# Altium PCB PCB1_2.PcbDoc
Units mil, origin at the board's own origin, x right, y up, seen from the top; angles counter-clockwise.
Board outline 3550 x 3015 mil, 5 copper layers (Top Layer, GND, Layer 1, Layer 2, Bottom Layer), stack 19.334 mil thick; 346 components, 184 nets, 814 pads, 0 vias.
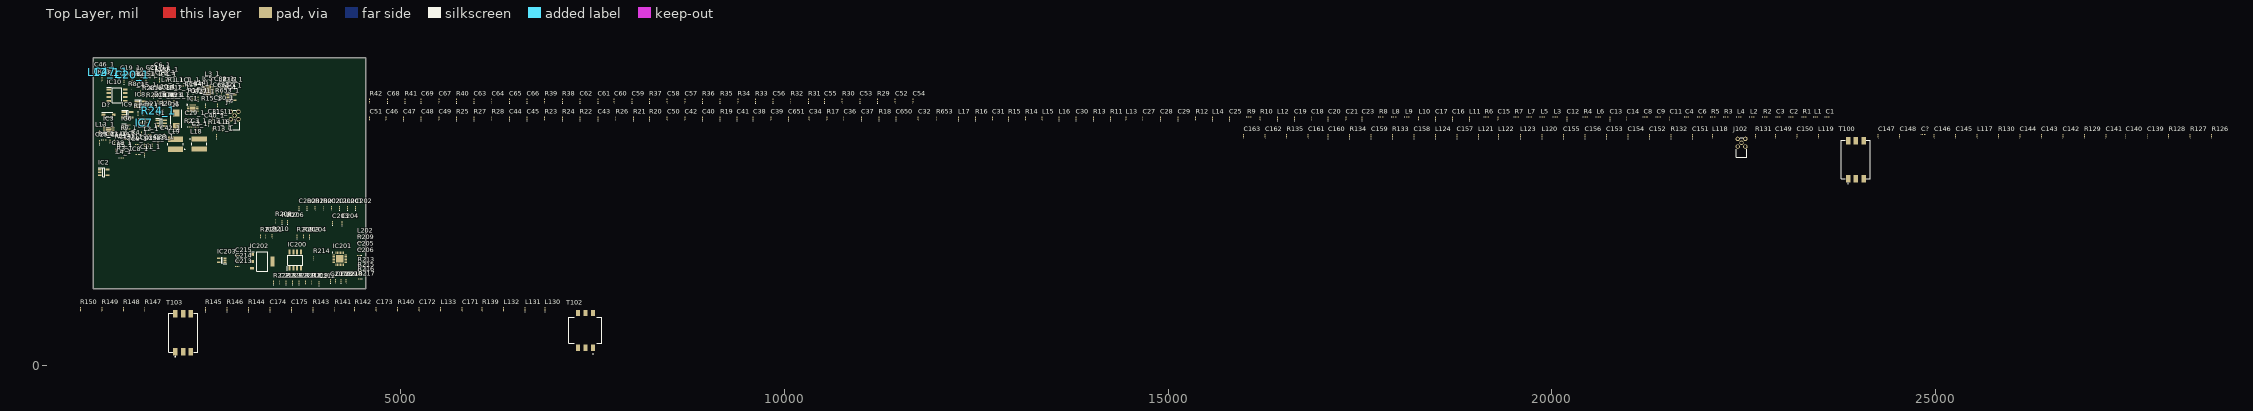
[diagram p0: Top Layer view]
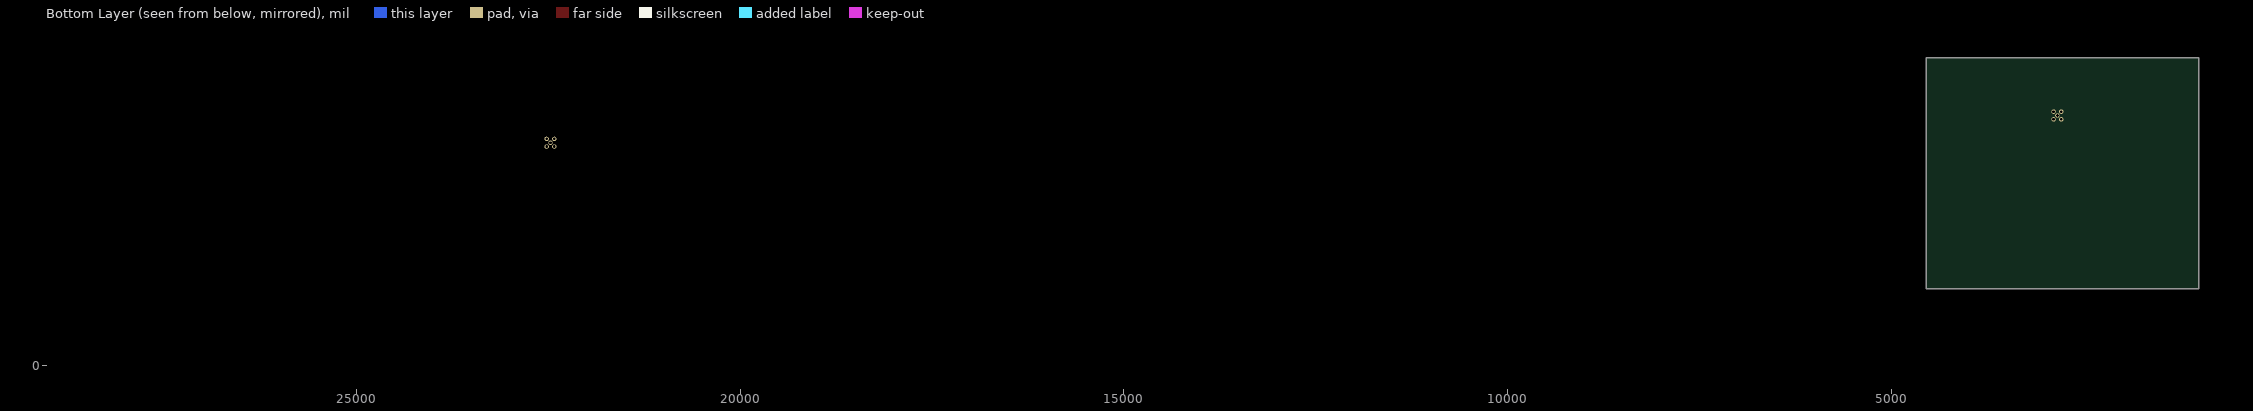
[diagram p1: Bottom Layer view, seen from below]
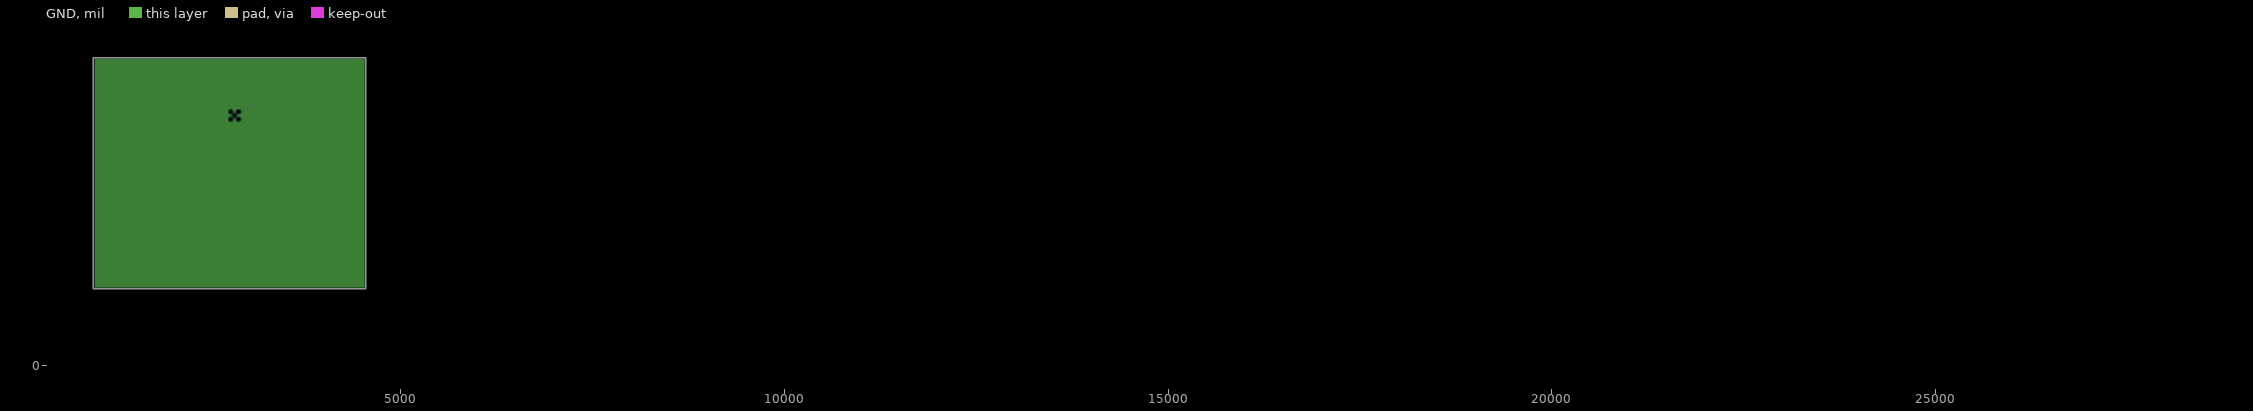
[diagram p2: GND, clearances drawn from the general rule]

## Layer stack, top to bottom
Top Solder: solder mask 0.4, Solder Resist, Dk 3.5
Top Layer: signal copper 1.4
Dielectric 2: prepreg 2.8, PP-006, Dk 4.1
GND: plane copper 1.378
Dielectric 1: core 4, Core-009, Dk 4.5
Layer 1: signal copper 1.378
Dielectric 4: prepreg 2.8, PP-006, Dk 4.1
Layer 2: signal copper 1.378
Dielectric 5: prepreg 2.8, PP-006, Dk 4.1
Bottom Layer: signal copper 1.4
Bottom Solder: solder mask 0.4, Solder Resist, Dk 3.5

## Board outline
1000,1000 4550,1000 4550,4015 1000,4015

## Design rules (kind name [scope] priority, off if disabled: settings)
Clearance [All] p1: gap=10 ignorepadtopadclearanceinfootprint=FALSE except(0: Arc-Hole Track-Hole SMDPad-Hole THPad-Hole Via-Hole Fill-Hole Poly-Hole Region-Hole Text-Hole; 5: Arc-SMDPad Track-SMDPad SMDPad-SMDPad)
DiffPairsRouting [All] p1 off: maxlimit=10 minlimit=10 mostfreqgap=10 toplayer_minwidth=15 toplayer_maxwidth=15 toplayer_prefwidth=15 midlayer1_minwidth=15 midlayer1_maxwidth=15 midlayer1_prefwidth=15 midlayer2_minwidth=15 midlayer2_maxwidth=15 midlayer2_prefwidth=15 bottomlayer_minwidth=15 bottomlayer_maxwidth=15 bottomlayer_prefwidth=15 maxuncoupledlength=500
PlaneClearance [All] p1: clearance=20
PlaneConnect [All] p1: planeconnectstyle=Relief reliefexpansion=20 reliefentries=4 reliefconductorwidth=10 reliefairgap=10
PolygonConnect [All] p1: connectstyle=Relief reliefconductorwidth=10 reliefentries=4 polygonreliefangle="90 Angle" airgapwidth=10
RoomDefinition PA [InComponentClass('PA')] p1: confinementstyle=ConfineIn formatcopy=TRUE lockcomponents=FALSE outline 4580,3180 23665,3180 23665,3360 4580,3360
RoomDefinition Sheet1 [InComponentClass('Sheet1')] p2: confinementstyle=ConfineIn formatcopy=TRUE lockcomponents=FALSE outline 4580,3410 11850,3410 11850,3590 4580,3590
RoutingVias [All] p1: holewidth=28 width=50 viastyle="Through Hole" minholewidth=28 minwidth=50 maxholewidth=28 maxwidth=50
SolderMaskExpansion [All] p1: expansion=4 istentingtop=FALSE
Width [All] p1: maxlimit=10 minlimit=5 preferedwidth=5 minimp=50.000000 maximp=50.000000 favimp=50.000000
27 further rules are at their usual default settings.

## Classes and differential pairs
component class TELEMETRY: C200 C201 C202 C203 C204 C205 C206 C207 C208 C209 C210 C211 C212 C213 C214 C215 IC200 IC201 IC202 IC203 L200 L201 L202 R200 R201 R202 R203 R204 R205 R206 R207 R208 R209 R210 R211 R212 R213 R214 R215 R216 R217 R218 R219 R220 R221 R222 R223
component class Sheet1: C52 C53 C54 C55 C56 C57 C58 C59 C60 C61 C62 C63 C64 C65 C66 C67 C68 C69 J? R29 R30 R31 R32 R33 R34 R35 R36 R37 R38 R39 R40 R41 R42
component class PA: C1 C2 C3 C4 C6 C8 C9 C11 C12 C13 C14 C15 C16 C17 C18 C19 C20 C21 C23 C25 C27 C28 C29 C30 C31 C32 C34 C36 C37 C38 C39 C40 C41 C42 C43 C44 C45 C46 C47 C48 C49 C50 C51 C650 C651 D6 D? IC1 IC2 IC3 IC4 IC5 IC6 IC7 IC8 IC9 IC10 L1 L2 L3 L4 L5 L6 L7 L8 L9 L10 L11 L12 L13 L14 L15 L16 L17 L18 L19 Q1 R1 R2 R3 R4 R5 R6 R7 R8 R9 R10 R11 R12 R13 R14 R15 R16 R17 R18 R19 R20 R21 R22 R23 R24 R25 R26 R27 R28 R653
component class "Mixers and IF": C139 C140 C141 C142 C143 C144 C145 C146 C147 C148 C149 C150 C151 C152 C153 C154 C155 C156 C157 C158 C159 C160 C161 C162 C163 C171 C172 C173 C174 C175 C? J102 L117 L118 L119 L120 L121 L122 L123 L124 L130 L131 L132 L133 R126 R127 R128 R129 R130 R131 R132 R133 R134 R135 R139 R140 R141 R142 R143 R144 R145 R146 R147 R148 R149 R150 T100 T102 T103

## Components (designator, comment, footprint, x,y, rotation, side; value= is the part's Value field where it differs from the comment)
C1 "Cap" 0603 23595,3240 r0 top value=33pF
C1_1 "Cap" 0603 2250,3645 r180 top value=33pF
C2 "Cap" 0603 23125,3240 r0 top value=1uF
C2_1 "Cap" 0603 2360,3070 r0 top value=1uF
C3 "Cap" 0603 22955,3240 r0 top value=470pF
C3_1 "Cap" 0603 2350,3110 r0 top value=470pF
C4 "Cap" 0603 21765,3240 r0 top value=12pF
C4_1 "Cap" 0603 1960,3720 r0 top value=12pF
C6 "Cap" 0603 21935,3240 r0 top value=5.1pF
C6_1 "Cap" 0603 1875,3840 r0 top value=5.1pF
C8 "Cap" 0603 21225,3240 r0 top value=10pF
C8_1 "Cap" 0603 1575,2750 r180 top value=10pF
C9 "Cap" 0603 21395,3240 r0 top value=5.1pF
C9_1 "Cap" 0603 1565,2880 r180 top value=5.1pF
C11 "Cap" 0603 21535,3225 r90 top value=470pF
C11_1 "Cap" 0603 1665,2755 r90 top value=470pF
C12 "Cap" 0603 20195,3225 r90 top value=470pF
C12_1 "Cap" 0603 1860,3715 r270 top value=470pF
C13 "Cap" 0603 20755,3225 r90 top value=470pF
C13_1 "Cap" 0603 1385,2895 r90 top value=470pF
C14 "Cap" 0603 20975,3225 r90 top value=10nF
C14_1 "Cap" 0603 1275,2921.22 r90 top value=10nF
C15 "Cap" 0603 19295,3225 r90 top value=33pF
C15_1 "Cap" 0603 1615,3560 r90 top value=33pF
C16 "Cap" 0603 18705,3225 r90 top value=6.8pF
C16_1 "Cap" 0603 1785,3525 r90 top value=6.8pF
C17 "Cap" 0603 18485,3225 r90 top value=470pF
C17_1 "Cap" 0603 1795,3783.78 r90 top value=470pF
C18 "Cap" 0603 16865,3225 r90 top value=470pF
C18_1 "Cap" 0603 1295,2805 r90 top value=470pF
C19 "Cap" 0603 16645,3225 r90 top value=470pF
C19_1 "Cap" 0603 1400,3785 r90 top value=470pF
C20 "Cap" 0603 17085,3225 r90 top value=5.1pF
C20_1 "Cap" 0603 1510,3790 r90 top value=5.1pF
C21 "Cap" 0603 17315,3225 r90 top value=16pF
C21_1 "Cap" 0603 1740,3790 r90 top value=16pF
C23 "Cap" 0603 17525,3225 r90 top value=5.1pF
C23_1 "Cap" 0603 1215,2925 r90 top value=5.1pF
C25 "Cap" 0603 15800,3225 r90 top value=470pF
C25_1 "Cap" 0603 1080,2915 r90 top value=470pF
C27 "Cap" 0603 14670,3225 r90 top value=12pF
C27_1 "Cap" 0603 2365,3481.22 r90 top value=12pF
C28 "Cap" 0603 14900,3225 r90 top value=470pF
C28_1 "Cap" 0603 1840,2890 r90 top value=470pF
C29 "Cap" 0603 15130,3225 r90 top value=1uF
C29_1 "Cap" 0603 2240,3195 r90 top value=1uF
C30 "Cap" 0603 13800,3225 r90 top value=470pF
C30_1 "Cap" 0603 2620,3393.78 r90 top value=470pF
C31 "Cap" 0603 12710,3225 r90 top value=470pF
C31_1 "Cap" 0603 2550,3220 r90 top value=470pF
C32 "Cap" 0603 11745,3225 r90 top value=470pF
C32_1 "Cap" 0603 2625,3640 r90 top value=470pF
C34 "Cap" 0603 10325,3225 r90 top value=1uF
C34_1 "Cap" 0603 2300,3578.78 r90 top value=1uF
C36 "Cap" 0603 10775,3225 r90 top value=4.7uF
C36_1 "Cap" 0603 1945,3530 r90 top value=4.7uF
C37 "Cap" 0603 11005,3225 r90 top value=4.7uF
C37_1 "Cap" 0603 1900,3435 r90 top value=4.7uF
C38 "Cap" 0603 9595,3225 r90 top value=22uF
C38_1 "Cap" 0603 1765,2870 r90 top value=22uF
C39 "Cap" 0603 9825,3225 r90 top value=22uF
C39_1 "Cap" 0603 1715,2875 r90 top value=22uF
C40 "Cap" 0603 8935,3225 r90 top value=47uF
C40_1 "Cap" 0603 2500,3163.78 r90 top value=47uF
C41 "Cap" 0603 9385,3225 r90 top value=.1uF
C41_1 "Cap" 0603 1665,2870 r90 top value=.1uF
C42 "Cap" 0603 8705,3225 r90 top value=47uF
C42_1 "Cap" 0603 1925,3005 r90 top value=47uF
C43 "Cap" 0603 7575,3225 r90 top value=1uF
C43_1 "Cap" 0603 2320,3486.22 r90 top value=1uF
C44 "Cap" 0603 6420,3225 r90 top value=4.7uF
C44_1 "Cap" 0603 1630,3030 r90 top value=4.7uF
C45 "Cap" 0603 6650,3225 r90 top value=4.7uF
C45_1 "Cap" 0603 1985,3435 r90 top value=4.7uF
C46 "Cap" 0603 4810,3225 r90 top value=4.7uF
C46_1 "Cap" 0603 1065,3828.78 r90 top value=4.7uF
C47 "Cap" 0603 5040,3225 r90 top value=4.7uF
C47_1 "Cap" 0603 1235,3830 r90 top value=4.7uF
C48 "Cap" 0603 5270,3225 r90 top value=1uF
C48_1 "Cap" 0603 1505,3703.78 r90 top value=1uF
C49 "Cap" 0603 5500,3225 r90 top value=470pF
C49_1 "Cap" 0603 1400,3703.78 r90 top value=470pF
C50 "Cap" 0603 8475,3225 r90 top value=220pF
C50_1 "Cap" 0603 1645,3280 r270 top value=220pF
C51 "Cap" 0603 4600,3225 r90 top value=.1uF
C51_1 "Cap" 0603 1685,3705 r90 top value=.1uF
C52 "Cap" 0603 11445,3455 r90 top value=470pF
C53 "Cap" 0603 10985,3455 r90 top value=470pF
C54 "Cap" 0603 11675,3455 r90 top value=470pF
C55 "Cap" 0603 10525,3455 r90 top value=470pF
C56 "Cap" 0603 9855,3455 r90 top value=470pF
C57 "Cap" 0603 8705,3455 r90 top value=470pF
C58 "Cap" 0603 8475,3455 r90 top value=470pF
C59 "Cap" 0603 8015,3455 r90 top value=.1uF
C60 "Cap" 0603 7785,3455 r90 top value=.1uF
C61 "Cap" 0603 7575,3455 r90 top value=.1uF
C62 "Cap" 0603 7340,3455 r90 top value=470pF
C63 "Cap" 0603 5960,3455 r90 top value=4.7uF
C64 "Cap" 0603 6190,3455 r90 top value=4.7uF
C65 "Cap" 0603 6420,3455 r90 top value=.1uF
C66 "Cap" 0603 6650,3455 r90 top value=.1uF
C67 "Cap" 0603 5500,3455 r90 top value=4.7uF
C68 "Cap" 0603 4830,3455 r90 top value=1uF
C69 "Cap" 0603 5270,3455 r90 top value=4.7uF
C139 "Cap" 0603 27755,2995 r90 top value=470pF
C140 "Cap" 0603 27475,2995 r90 top value=1nF
C141 "Cap" 0603 27215,2995 r90 top value=470pF
C142 "Cap" 0603 26655,2995 r90 top value=1nF
C143 "Cap" 0603 26375,2995 r90 top value=16pF
C144 "Cap" 0603 26095,2995 r90 top value=1nF
C145 "Cap" 0603 25260,2995 r90 top value=1.8pF
C146 "Cap" 0603 24980,2995 r90 top value=4.7uF
C147 "Cap" 0603 24250,2995 r90 top value=4.7uF
C148 "Cap" 0603 24530,2995 r90 top value=4.7uF
C149 "Cap" 0603 22910,2995 r90 top value=82pF
C150 "Cap" 0603 23190,2995 r90 top value=82pF
C151 "Cap" 0603 21830,2995 r90 top value=470pF
C152 "Cap" 0603 21270,2995 r90 top value=1nF
C153 "Cap" 0603 20710,2995 r90 top value=470pF
C154 "Cap" 0603 20990,2995 r90 top value=470pF
C155 "Cap" 0603 20150,2995 r90 top value=.5pF
C156 "Cap" 0603 20430,2995 r90 top value=1.8pF
C157 "Cap" 0603 18765,2995 r90 top value=22pF
C158 "Cap" 0603 18205,2995 r90 top value=1nF
C159 "Cap" 0603 17645,2995 r90 top value=470pF
C160 "Cap" 0603 17085,2995 r90 top value=470pF
C161 "Cap" 0603 16825,2995 r90 top value=1.8pF
C162 "Cap" 0603 16265,2995 r90 top value=1nF
C163 "Cap" 0603 15985,2995 r90 top value=3.9pF
C171 "Cap" 0603 5805,740 r90 top value=1nF
C172 "Cap" 0603 5245,740 r90 top value=1nF
C173 "Cap" 0603 4685,740 r90 top value=1.8pF
C174 "Cap" 0603 3300,740 r90 top value=1nF
C175 "Cap" 0603 3580,740 r90 top value=1nF
C200 "Cap" 0603 3680,2058.78 r90 top value=10nF
C201 "Cap" 0603 4100,2058.78 r90 top value=180pF
C202 "Cap" 0603 4415,2058.78 r90 top value=560pF
C203 "Cap" 0603 4115,1863.78 r90 top value=270pF
C204 "Cap" 0603 4240,1858.78 r90 top value=270pF
C205 "Cap" 0603 4460,1520 r180 top value=1nF
C206 "Cap" 0603 4460,1435 r180 top value=4.7uF
C207 "Cap" 0603 4088.33,1108.78 r90 top value=2.2pF
C208 "Cap" 0603 4156.67,1108.78 r90 top value=2.2pF
C209 "Cap" 0603 4225,1108.78 r90 top value=2.2pF
C210 "Cap" 0603 4293.33,1108.78 r90 top value=2.2pF
C211 "Cap" 0603 3428.33,1088.78 r90 top value=1nF
C212 "Cap" 0603 3940,1080 r90 top value=10nF
C213 "Cap" 0603 2870,1295 r180 top value=1nF
C214 "Cap" 0603 2870,1365 r180 top value=4.7uF
C215 "Cap" 0603 2870,1435 r180 top value=4.7uF
C650 "Cap" 0603 11455,3225 r90 top value=39pF
C650_1 "Cap" 0603 2670,3555 r90 top value=39pF
C651 "Cap" 0603 10055,3225 r90 top value=39pF
C651_1 "Cap" 0603 2610,3560 r90 top value=39pF
C? "Cap" 0603 24840,3010 r0 top value=4.7uF
D6 "MBRS120T3G" DIOM5436X247N 2080,3205 r270 top
D? "BAT46W-7-F" SOD3716X145N 1200,3270 r0 top
IC1 "RFPA0133TR7" QFN50P300X300X86-17N-D 2295,3340 r0 top
IC2 "RF2878SR" SOT95P280X159-5N 1135,2520 r0 top
IC3 "RFPA0133TR7" QFN50P300X300X86-17N-D 1200,3075 r0 top
IC4 "RF2878SR" SOT95P280X159-5N 2795,3495 r0 top
IC5 "LTC5533EDE#PBF" SON50P300X400X85-13N-D 2495,3590 r0 top
IC6 "FPF2000" SOT65P210X110-5N#1 1425,3110 r0 top
IC7 "LTC1772CS6#TRMPBF" SOT95P280X100-6N 1660,3165 r0 top
IC8 "MCP6231UT-E_OT" SOT95P270X145-5N 1615,3405 r0 top
IC9 "MCP6231UT-E_OT" SOT95P270X145-5N 1444.21,3270 r0 top
IC10 "LT1963AES8-3.3#PBF" SOIC127P599X175-8N 1310,3525 r0 top
IC200 "THS4531ID" SOIC127P600X175-8N 3630,1375 r90 top
IC201 "LTC5599IUF#TRPBF" QFN50P400X400X80-25N-D 4210,1395 r0 top
IC202 "LT1963EST-2.5" SOT230P700X180-4N 3200,1360 r0 top
IC203 "FPF2000" SOT65P210X110-5N#2 2675.63,1375.59 r180 top
J102 "CONMMCX002" CONMMCX002 22470,2905 r90 top
J? "CONMMCX002" CONMMCX002 2840,3260 r90 top
L1 "Inductor" 0603 23445,3240 r0 top value=8.7nH
L1_1 "Inductor" 0603 2155,3645 r0 top value=8.7nH
L2 "Inductor" 0603 22615,3240 r0 top value=18nH
L2_1 "Inductor" 0603 1735,3010 r0 top value=18nH
L3 "Inductor" 0603 20055,3240 r0 top value=10.4nH
L3_1 "Inductor" 0603 2530,3725 r0 top value=10.4nH
L4 "Inductor" 0603 22445,3240 r0 top value=18nH
L4_1 "Inductor" 0603 1375,2705 r0 top value=18nH
L5 "Inductor" 0603 19885,3240 r0 top value=25nH
L5_1 "Inductor" 0603 1876.22,3785 r0 top value=25nH
L6 "Inductor" 0603 20615,3240 r0 top value=25nH
L6_1 "Inductor" 0603 1430,2950 r0 top value=25nH
L7 "Inductor" 0603 19715,3240 r0 top value=18nH
L7_1 "Inductor" 0603 1965,3645 r0 top value=18nH
L8 "Inductor" 0603 17950,3240 r0 top value=8.7nH
L8_1 "Inductor" 0603 1215,3745 r180 top value=8.7nH
L9 "Inductor" 0603 18120,3240 r0 top value=25nH
L9_1 "Inductor" 0603 1635,3775 r0 top value=25nH
L10 "Inductor" 0603 18265,3225 r90 top value=18nH
L10_1 "Inductor" 0603 1880,3531.22 r270 top value=18nH
L11 "Inductor" 0603 18925,3225 r90 top value=25nH
L11_1 "Inductor" 0603 1455,2890 r90 top value=25nH
L12 "Inductor" 0603 16425,3225 r90 top value=18nH
L12_1 "Inductor" 0603 1145,3825 r90 top value=18nH
L13 "Inductor" 0603 14450,3225 r90 top value=18nH
L13_1 "Inductor" 0603 1080,3046.22 r90 top value=18nH
L14 "Inductor" 0603 15580,3225 r90 top value=10.4nH
L14_1 "Inductor" 0603 2365,3595 r90 top value=10.4nH
L15 "Inductor" 0603 13360,3225 r90 top value=39nH
L15_1 "Inductor" 0603 2610,3213.78 r90 top value=39nH
L16 "Inductor" 0603 13580,3225 r90 top value=18nH
L16_1 "Inductor" 0603 2680,3073.78 r270 top value=18nH
L17 "Inductor" 0603 12270,3225 r90 top value=39nH
L17_1 "Inductor" 0603 2685,3635 r90 top value=39nH
L18 "MSS5131-472MLB" MSS5131 2380,2889.25 r0 top
L19 "MSS5131-103MLB" MSS5131 2070,2885.75 r180 top
L117 "Inductor" 0603 25540,2995 r90 top value=2508_23
L118 "Inductor" 0603 22090,2995 r90 top value=1508_13
L119 "Inductor" 0603 23470,2995 r90 top value=1508_23
L120 "Inductor" 0603 19870,2995 r90 top value=18nH
L121 "Inductor" 0603 19045,2995 r90 top value=2.7uH
L122 "Inductor" 0603 19305,2995 r90 top value=2.7uH
L123 "Inductor" 0603 19590,2995 r90 top value=8.2uH
L124 "Inductor" 0603 18485,2995 r90 top value=18nH
L130 "Inductor" 0603 6885,740 r90 top value=68nH
L131 "Inductor" 0603 6625,740 r90 top value=8.2uH
L132 "Inductor" 0603 6345,740 r90 top
L133 "Inductor" 0603 5525,740 r90 top value=1.5uH
L200 "Inductor" 0603 4205,2058.78 r90 top value=120nH
L201 "Inductor" 0603 4310,2058.78 r90 top value=47nH
L202 "Inductor" 0603 4460,1690 r180 top value=330nH
Q1 "FDC638P" SOT95P280X110-6N 1885,3160 r0 top
R1 "Res1" 0603 23295,3240 r0 top value=10
R1_1 "Res1" 0603 2055,3645 r0 top value=10
R2 "Res1" 0603 22785,3240 r0 top value=560
R2_1 "Res1" 0603 2265,3110 r0 top value=560
R3 "Res1" 0603 22275,3240 r0 top value=510
R3_1 "Res1" 0603 1375,2755 r180 top value=510
R4 "Res1" 0603 20445,3240 r0 top value=200
R4_1 "Res1" 0603 1576.22,2965 r0 top value=200
R5 "Res1" 0603 22105,3240 r0 top value=1.8k
R5_1 "Res1" 0603 1375,2800 r180 top value=1.8k
R6 "Res1" 0603 19155,3240 r0 top value=100
R6_1 "Res1" 0603 1975,3785 r0 top value=100
R7 "Res1" 0603 19545,3240 r0 top value=100
R7_1 "Res1" 0603 1425,3020 r180 top value=100
R8 "Res1" 0603 17780,3240 r0 top value=10
R8_1 "Res1" 0603 1535,3595 r0 top value=10
R9 "Res1" 0603 16060,3240 r0 top value=200
R9_1 "Res1" 0603 1145,2940 r0 top value=200
R10 "Res1" 0603 16200,3225 r90 top value=1.5k
R10_1 "Res1" 0603 1845,3435 r90 top value=1.5k
R11 "Res1" 0603 14250,3225 r90 top value=15
R11_1 "Res1" 0603 1335,2895 r90 top value=15
R12 "Res1" 0603 15360,3225 r90 top value=49.9
R12_1 "Res1" 0603 2050,3530 r90 top value=49.9
R13 "Res1" 0603 14030,3225 r90 top value=1.2k
R13_1 "Res1" 0603 2605,2993.78 r90 top value=1.2k
R14 "Res1" 0603 13140,3225 r90 top value=510
R14_1 "Res1" 0603 2550,3081.22 r90 top value=510
R15 "Res1" 0603 12920,3225 r90 top value=2k
R15_1 "Res1" 0603 2460,3380 r270 top value=2k
R16 "Res1" 0603 12490,3225 r90 top value=15
R16_1 "Res1" 0603 2735,3635 r90 top value=15
R17 "Res1" 0603 10555,3225 r90 top value=68k
R17_1 "Res1" 0603 2285,3490 r90 top value=68k
R18 "Res1" 0603 11235,3225 r90 top value=.03
R18_1 "Res1" 0603 1950,3435 r90 top value=.03
R19 "Res1" 0603 9165,3225 r90 top value=12k
R19_1 "Res1" 0603 2240,3570 r90 top value=12k
R20 "Res1" 0603 8245,3225 r90 top value=100k
R20_1 "Res1" 0603 1910,3320 r90 top value=100k
R21 "Res1" 0603 8035,3225 r90 top value=4.7k
R21_1 "Res1" 0603 1735,3315 r90 top value=4.7k
R22 "Res1" 0603 7340,3225 r90 top value=1.8k
R22_1 "Res1" 0603 1740,3430 r90 top value=1.8k
R23 "Res1" 0603 6880,3225 r90 top value=470k
R23_1 "Res1" 0603 2050,3435 r90 top value=470k
R24 "Res1" 0603 7110,3225 r90 top value=200k
R24_1 "Res1" 0603 1845,3323.78 r90 top value=200k
R25 "Res1" 0603 5730,3225 r90 top value=5.11k
R25_1 "Res1" 0603 1110,3735 r90 top value=5.11k
R26 "Res1" 0603 7805,3225 r90 top value=10k
R26_1 "Res1" 0603 1580,3280 r270 top value=10k
R27 "Res1" 0603 5960,3225 r90 top value=300k
R27_1 "Res1" 0603 1600,3698.78 r270 top value=300k
R28 "Res1" 0603 6190,3225 r90 top value=3.83k
R28_1 "Res1" 0603 1690,3526.22 r90 top value=3.83k
R29 "Res1" 0603 11215,3455 r90 top value=1M
R30 "Res1" 0603 10755,3455 r90 top value=100
R31 "Res1" 0603 10315,3455 r90 top value=100
R32 "Res1" 0603 10085,3455 r90 top value=1M
R33 "Res1" 0603 9625,3455 r90 top value=1M
R34 "Res1" 0603 9395,3455 r90 top value=100
R35 "Res1" 0603 9165,3455 r90 top value=100
R36 "Res1" 0603 8935,3455 r90 top value=1M
R37 "Res1" 0603 8245,3455 r90 top value=100
R38 "Res1" 0603 7110,3455 r90 top value=100
R39 "Res1" 0603 6880,3455 r90 top value=.1
R40 "Res1" 0603 5730,3455 r90 top value=430k
R41 "Res1" 0603 5060,3455 r90 top value=5.76k
R42 "Res1" 0603 4600,3455 r90 top value=3.83k
R126 "Res1" 0603 28595,2995 r90 top value=TBD
R127 "Res1" 0603 28315,2995 r90 top value=10k
R128 "Res1" 0603 28035,2995 r90 top value=15k
R129 "Res1" 0603 26935,2995 r90 top value=470
R130 "Res1" 0603 25815,2995 r90 top value=2.2k
R131 "Res1" 0603 22650,2995 r90 top value=470
R132 "Res1" 0603 21550,2995 r90 top value=3
R133 "Res1" 0603 17925,2995 r90 top value=TBD
R134 "Res1" 0603 17365,2995 r90 top value=15k
R135 "Res1" 0603 16545,2995 r90 top value=10k
R139 "Res1" 0603 6065,740 r90 top value=560
R140 "Res1" 0603 4965,740 r90 top value=2.7k
R141 "Res1" 0603 4145,740 r90 top value=2.2k
R142 "Res1" 0603 4405,740 r90 top value=5.1
R143 "Res1" 0603 3860,740 r90 top value=1k
R144 "Res1" 0603 3020,740 r90 top value=1k
R145 "Res1" 0603 2460,740 r90 top value=10k
R146 "Res1" 0603 2740,740 r90 top value=470
R147 "Res1" 0603 1670,740 r90 top value=62
R148 "Res1" 0603 1390,740 r90 top value=4.7k
R149 "Res1" 0603 1110,740 r90 top value=10k
R150 "Res1" 0603 830,740 r90 top value=470
R200 "Res1" 0603 3890,2058.78 r90 top value=68
R201 "Res1" 0603 3785,2058.78 r90 top value=100
R202 "Res1" 0603 3995,2058.78 r90 top value=100
R203 "Res1" 0603 3735,1688.78 r90 top value=TBD
R204 "Res1" 0603 3817.5,1688.78 r90 top value=10K
R205 "Res1" 0603 3652.5,1688.78 r90 top value=15K
R206 "Res1" 0603 3530,1877.56 r90 top value=10k
R207 "Res1" 0603 3459,1877.56 r90 top value=1k
R208 "Res1" 0603 3370,1885 r90 top value=10k
R209 "Res1" 0603 4460,1605 r180 top value=20k
R210 "Res1" 0603 3330,1693.78 r90 top value=200
R211 "Res1" 0603 3246,1688.78 r90 top value=10k
R212 "Res1" 0603 3175,1688.78 r90 top value=1K
R213 "Res1" 0603 4463.78,1310 r180 top value=1K
R214 "Res1" 0603 3865,1408.78 r90 top value=200
R215 "Res1" 0603 4463.78,1250 r180 top value=1K
R216 "Res1" 0603 4463.78,1190 r180 top value=1K
R217 "Res1" 0603 4468.78,1130 r180 top value=1K
R218 "Res1" 0603 3761.67,1088.78 r90 top value=1k
R219 "Res1" 0603 3845,1088.78 r90 top value=10k
R220 "Res1" 0603 3678.33,1088.78 r90 top value=20k
R221 "Res1" 0603 3511.67,1088.78 r90 top value=1.5k
R222 "Res1" 0603 3345,1088.78 r90 top value=56k
R223 "Res1" 0603 3595,1088.78 r90 top value=48.7k
R653 "Res1" 0603 11980,3225 r90 top value=1.5k
R653_1 "Res1" 0603 2640,3480 r270 top value=1.5k
T100 "SM-LP-5001E" SMLP5001E 23960,2675 r90 top
T102 "FA2469-ALB" FA2469ALB 7410,460 r90 top
T103 "SM-LP-5001E" SMLP5001E 2170,420 r90 top

## Footprints (in the part's own frame and the unit in brackets; to place one, negate y for a bottom-side part, rotate by r counter-clockwise, add the part's x,y. Pads: shape width x height; smd on the part's side, far side on the other; paste and mask are expansions set on the pad)
0603 [mm] "Chip Inductor, Body 0.6x0.3mm, IPC High Density"
  rect 0.5x0.3 smd: 1(-0.35,0) 2(0.35,0)
  silkscreen extent -0.9,-0.05 -0.9,0.05, body extent -0.33,-0.18 0.33,0.18, height 0.55
CONMMCX002 [mm]
  round 1.446 hole 0.89: 1(0,0) 2(-1.27,1.27) 3(-1.27,-1.27) 4(1.27,-1.27) 5(1.27,1.27)
  silkscreen extent -4.73,-1.73 1.73,1.73, body extent -4.72,-1.73 1.73,1.73, height 3.45
DIOM5436X247N [mm]
  rect 2.25x2.15 smd: 1(-2.2,0) 2(2.2,0)
  silkscreen extent -3.28,-1.81 2.7,1.81, body extent -2.7,-1.81 2.7,1.81, height 2.47
FA2469ALB [mm]
  rect 2.03x1.27 smd: 1(-5.715,-2.5) 2(-5.715,0) 3(-5.715,2.5) 4(5.715,2.5) 5(5.715,0) 6(5.715,-2.5)
  silkscreen extent -7.8,-5.46 4.3,5.46
MSS5131 [mm]
  rect 5.08x1.74 smd: 1(0,1.67) 2(0,-1.67)
  silkscreen extent -3.14,-0.4 2.55,1.78
QFN50P300X300X86-17N-D [mm]
  rect 0.8x0.25 smd: 1(-1.45,0.75) 2(-1.45,0.25) 3(-1.45,-0.25) 4(-1.45,-0.75) 5(-0.75,-1.45) 6(-0.25,-1.45) 7(0.25,-1.45) 8(0.75,-1.45) 9(1.45,-0.75) 10(1.45,-0.25) 11(1.45,0.25) 12(1.45,0.75) 13(0.75,1.45) 14(0.25,1.45) 15(-0.25,1.45) 16(-0.75,1.45)
  rect 1.75x1.75 smd: 17(0,0)
  silkscreen extent -1.97,1.38 -1.72,1.62, body extent -1.55,-1.55 1.55,1.55, height 0.85
QFN50P400X400X80-25N-D [mm]
  rect 0.85x0.3 smd: 1(-1.95,1.25) 2(-1.95,0.75) 3(-1.95,0.25) 4(-1.95,-0.25) 5(-1.95,-0.75) 6(-1.95,-1.25) 13(1.95,-1.25) 14(1.95,-0.75) 15(1.95,-0.25) 16(1.95,0.25) 17(1.95,0.75) 18(1.95,1.25)
  rect 0.3x0.85 smd: 7(-1.25,-1.95) 8(-0.75,-1.95) 9(-0.25,-1.95) 10(0.25,-1.95) 11(0.75,-1.95) 12(1.25,-1.95) 19(1.25,1.95) 20(0.75,1.95) 21(0.25,1.95) 22(-0.25,1.95) 23(-0.75,1.95) 24(-1.25,1.95)
  rect 2.55x2.55 smd: 25(0,0)
  silkscreen extent -2.5,1.88 -2.25,2.12, body extent -2.05,-2.05 2.05,2.05, height 0.8
SMLP5001E [mm]
  rect 2.5x1.5 smd: 1(-6,2.54) 2(-6,0) 3(-6,-2.54) 4(6.5,-2.54) 5(6.5,0) 6(6.5,2.54)
  silkscreen extent -7.75,-4.8 6.65,4.8, body extent -7.1,-4.8 7.6,4.8, height 7.1
SOD3716X145N [mm]
  rect 1.2x0.75 smd: 1(-1.7,0) 2(1.7,0)
  silkscreen extent -2.3,-0.78 1.35,0.78, body extent -1.85,-0.77 1.85,0.77, height 1.45
SOIC127P599X175-8N [mm]
  rect 1.526x0.65 smd: 1(-2.712,1.905) 2(-2.712,0.635) 3(-2.712,-0.635) 4(-2.712,-1.905) 5(2.712,-1.905) 6(2.712,-0.635) 7(2.712,0.635) 8(2.712,1.905)
  silkscreen extent -3.47,-2.45 1.6,2.58, body extent -3,-2.45 3,2.45, height 1.75
SOIC127P600X175-8N [mm]
  rect 1.525x0.65 smd: 1(-2.712,1.905) 2(-2.712,0.635) 3(-2.712,-0.635) 4(-2.712,-1.905) 5(2.712,-1.905) 6(2.712,-0.635) 7(2.712,0.635) 8(2.712,1.905)
  silkscreen extent -3.47,-2.45 1.6,2.58, body extent -3,-2.45 3,2.45, height 1.75
SON50P300X400X85-13N-D [mm]
  rect 0.8x0.3 smd: 1(-1.5,1.25) 2(-1.5,0.75) 3(-1.5,0.25) 4(-1.5,-0.25) 5(-1.5,-0.75) 6(-1.5,-1.25) 7(1.5,-1.25) 8(1.5,-0.75) 9(1.5,-0.25) 10(1.5,0.25) 11(1.5,0.75) 12(1.5,1.25)
  rect 1.8x3.4 smd: 13(0,0)
  silkscreen extent -2.02,1.78 -1.77,2.02, body extent -1.55,-2 1.55,2, height 0.85
SOT65P210X110-5N#1 [mm]
  rect 1.05x0.4 smd: 1(-0.95,0.65) 2(-0.95,0) 3(-0.95,-0.65) 4(0.95,-0.65) 5(0.95,0.65)
  silkscreen extent -1.47,-1 0.07,1.1, body extent -1.05,-1 1.05,1, height 1.1
SOT65P210X110-5N#2 [mm]
  rect 1.15x0.45 smd: 1(-1,0.65) 2(-1,0) 3(-1,-0.65) 4(1,-0.65) 5(1,0.65)
  silkscreen extent -1.58,-1.01 0.07,1.12, body extent -1.05,-1.01 1.05,1.01, height 1.1
SOT95P270X145-5N [mm]
  rect 1.4x0.6 smd: 1(-1.25,0.95) 2(-1.25,0) 3(-1.25,-0.95) 4(1.25,-0.95) 5(1.25,0.95)
  silkscreen extent -1.95,-1.45 0.2,1.5, body extent -1.35,-1.45 1.35,1.45, height 1.45
SOT95P280X100-6N [mm]
  rect 1.05x0.55 smd: 1(-1.3,0.95) 2(-1.3,0) 3(-1.3,-0.95) 4(1.3,-0.95) 5(1.3,0) 6(1.3,0.95)
  silkscreen extent -1.82,-1.45 0.42,1.58, body extent -1.4,-1.45 1.4,1.45, height 1
SOT95P280X110-6N [mm]
  rect 1.2x0.6 smd: 1(-1.25,0.95) 2(-1.25,0) 3(-1.25,-0.95) 4(1.25,-0.95) 5(1.25,0) 6(1.25,0.95)
  silkscreen extent -1.85,-1.45 0.3,1.6, body extent -1.4,-1.45 1.4,1.45, height 1.1
SOT95P280X159-5N [mm]
  rect 1.2x0.6 smd: 1(-1.25,0.95) 2(-1.25,0) 3(-1.25,-0.95) 4(1.25,-0.95) 5(1.25,0.95)
  silkscreen extent -1.85,-1.45 0.3,1.5, body extent -1.4,-1.45 1.4,1.45, height 1.59
SOT230P700X180-4N [mm]
  rect 1.35x0.95 smd: 1(-3.35,2.3) 2(-3.35,0) 3(-3.35,-2.3)
  rect 1.35x3.25 smd: 4(3.35,0)
  silkscreen extent -4.02,-3.25 1.75,3.25, body extent -3.5,-3.25 3.5,3.25, height 1.8

## Part data
C1 C1_1 C2 C2_1 C3 C3_1 C4 C4_1 C6 C6_1 C8 C8_1 C9 C9_1 C11 C11_1 C12 C12_1 C13 C13_1 C14 C14_1 C15 C15_1 C16 C16_1 C17 C17_1 C18 C18_1 C19 C19_1 C20 C20_1 C21 C21_1 C23 C23_1 C25 C25_1 C27 C27_1 C28 C28_1 C29 C29_1 C30 C30_1 C31 C31_1 C32 C32_1 C34 C34_1 C36 C36_1 C37 C37_1 C38 C38_1 C39 C39_1 C40 C40_1 C41 C41_1 C42 C42_1 C43 C43_1 C44 C44_1 C45 C45_1 C46 C46_1 C47 C47_1 C48 C48_1 C49 C49_1 C50 C50_1 C51 C51_1 C52 C53 C54 C55 C56 C57 C58 C59 C60 C61 C62 C63 C64 C65 C66 C67 C68 C69 C139 C140 C141 C142 C143 C144 C145 C146 C147 C148 C149 C150 C151 C152 C153 C154 C155 C156 C157 C158 C159 C160 C161 C162 C163 C171 C172 C173 C174 C175 C200 C201 C202 C203 C204 C205 C206 C207 C208 C209 C210 C211 C212 C213 C214 C215 C650 C650_1 C651 C651_1 C?: "Capacitor", LatestRevisionDate=17-Jul-2002, LatestRevisionNote="Re-released for DXP Platform.", PackageDescription="Radial Cap, Thru-Hole; 2 Leads; 0.3 in Pin Spacing", PackageReference=RAD-0.3, Published=8-Jun-2000, Publisher="Altium Limited"
D6: "Diode", Manufacturer_Name="ON Semiconductor", Mouser Part Number=863-MBRS120T3G, RS Part Number=5452068P, Allied Price/Stock=http://www.alliedelec.com/on-semiconductor-mbrs120t3g/70339713/, Allied_Number=70339713, Datasheet Link=http://www.onsemi.com/pub/Collateral/MBRS120T3-D.PDF, Height=2.47mm, Manufacturer_Part_Number=MBRS120T3G, Mouser Price/Stock=https://www.mouser.com/Search/Refine.aspx?Keyword=863-MBRS120T3G, RS Price/Stock=http://uk.rs-online.com/web/p/products/5452068P
D?: "Diode", Manufacturer_Name="Diodes Inc.", Mouser Part Number=621-BAT46W-7-F, RS Part Number=7513373P, Allied Price/Stock=https://www.alliedelec.com/diodes-inc-bat46w-7-f/71028110/, Allied_Number=71028110, Datasheet Link=https://componentsearchengine.com/Datasheets/2/BAT46W-7-F.pdf, Height=1.45mm, Manufacturer_Part_Number=BAT46W-7-F, Mouser Price/Stock=https://www.mouser.com/Search/Refine.aspx?Keyword=621-BAT46W-7-F, RS Price/Stock=http://uk.rs-online.com/web/p/products/7513373P
IC1 IC3: "Integrated Circuit", Manufacturer_Name=Qorvo, Mouser Part Number=772-RFPA0133, Datasheet Link=http://www.qorvo.com/products/d/da000936, Height=0.855mm, Manufacturer_Part_Number=RFPA0133TR7, Mouser Price/Stock=https://www.mouser.com/Search/Refine.aspx?Keyword=772-RFPA0133
IC2 IC4: "Integrated Circuit", Manufacturer_Name=RFMD, Datasheet Link=https://datasheet.octopart.com/RF2878SR-RFMD-datasheet-17020116.pdf, Height=1.59mm, Manufacturer_Part_Number=RF2878SR
IC5: "Integrated Circuit", Manufacturer_Name="Linear Technology", Datasheet Link=https://componentsearchengine.com/Datasheets/2/LTC5533EDE#PBF.pdf, Height=0.85mm, Manufacturer_Part_Number=LTC5533EDE#PBF
IC6 IC203: "Integrated Circuit", Manufacturer_Name="ON Semiconductor", Mouser Part Number=512-FPF2000, RS Part Number=6709942P, Datasheet Link=https://www.onsemi.com/pub/Collateral/FPF2001-D.pdf, Height=1.1mm, Manufacturer_Part_Number=FPF2000, Mouser Price/Stock=https://www.mouser.com/Search/Refine.aspx?Keyword=512-FPF2000, RS Price/Stock=http://uk.rs-online.com/web/p/products/6709942P
IC7: "Integrated Circuit", Manufacturer_Name="Linear Technology", Mouser Part Number=584-LTC1772CS6TRMPBF, RS Part Number=0411891, Datasheet Link=http://docs-emea.rs-online.com/webdocs/0ab8/0900766b80ab84d2.pdf, Height=1mm, Manufacturer_Part_Number=LTC1772CS6#TRMPBF, Mouser Price/Stock=https://www.mouser.com/Search/Refine.aspx?Keyword=584-LTC1772CS6TRMPBF, RS Price/Stock=http://uk.rs-online.com/web/p/products/0411891
IC8 IC9: "Integrated Circuit", Manufacturer_Name=Microchip, Manufacturer_Part_Number=MCP6231UT-E/OT, Mouser Part Number=579-MCP6231UT-E/OT, RS Part Number=6674468, Allied Price/Stock=http://www.alliedelec.com/microchip-technology-inc-mcp6231ut-e-ot/70414221/, Allied_Number=70414221, Datasheet Link=http://ww1.microchip.com/downloads/en/DeviceDoc/21881e.pdf, Height=1.45mm, Mouser Price/Stock=https://www.mouser.com/Search/Refine.aspx?Keyword=579-MCP6231UT-E%2FOT, RS Price/Stock=https://uk.rs-online.com/web/p/products/6674468
IC10: "Integrated Circuit", Manufacturer_Name="Linear Technology", Mouser Part Number=584-1963AES8-3.3PBF, RS Part Number=7618550P, Datasheet Link=http://www.linear.com/docs/3709, Height=1.752mm, Manufacturer_Part_Number=LT1963AES8-3.3#PBF, Mouser Price/Stock=https://www.mouser.com/Search/Refine.aspx?Keyword=584-1963AES8-3.3PBF, RS Price/Stock=http://uk.rs-online.com/web/p/products/7618550P
IC200: "Integrated Circuit", Manufacturer_Name="Texas Instruments", Mouser Part Number=595-THS4531ID, RS Part Number=7741408P, Datasheet Link=http://www.ti.com/lit/gpn/ths4531, Height=1.75mm, Manufacturer_Part_Number=THS4531ID, Mouser Price/Stock=https://www.mouser.com/Search/Refine.aspx?Keyword=595-THS4531ID, RS Price/Stock=http://uk.rs-online.com/web/p/products/7741408P
IC201: "Integrated Circuit", Manufacturer_Name="Linear Technology", Mouser Part Number=584-LTC5599IUF#TRPBF, Datasheet Link=http://www.linear.com/docs/45277, Height=0.8mm, Manufacturer_Part_Number=LTC5599IUF#TRPBF, Mouser Price/Stock=https://www.mouser.com/Search/Refine.aspx?Keyword=584-LTC5599IUF%23TRPBF
IC202: "Integrated Circuit", Manufacturer_Name="Linear Technology", Mouser Part Number=584-LT1963EST-2.5, Datasheet Link=https://www.mouser.com/datasheet/2/609/1963fc-1270290.pdf, Height=1.8mm, Manufacturer_Part_Number=LT1963EST-2.5, Mouser Price/Stock=https://www.mouser.com/Search/Refine.aspx?Keyword=584-LT1963EST-2.5
J102: "Connector", Manufacturer_Name="Linx Technologies", Mouser Part Number=712-CONMMCX002, Datasheet Link=https://linxtechnologies.com/wp/wp-content/uploads/conmmcx002.pdf, Height=3.45mm, Manufacturer_Part_Number=CONMMCX002, Mouser Price/Stock=https://www.mouser.com/Search/Refine.aspx?Keyword=712-CONMMCX002
J?: library part FSI-105-06-L-D-AD-TR, "Connector", Manufacturer_Name=SAMTEC, Datasheet Link=http://suddendocs.samtec.com/prints/fsi-1xx-xx-xxx-d-x-xx-xx-mkt.pdf, Height=7.4mm, Manufacturer_Part_Number=FSI-105-06-L-D-AD-TR
L18: "Inductor", Manufacturer_Name=COILCRAFT, Mouser Part Number=994-MSS5131-472MLB, Datasheet Link=http://www.coilcraft.com/pdfs/mss5131.pdf, Manufacturer_Part_Number=MSS5131-472MLB, Mouser Price/Stock=https://www.mouser.com/Search/Refine.aspx?Keyword=994-MSS5131-472MLB
L19: "Inductor", Manufacturer_Name=COILCRAFT, Mouser Part Number=994-MSS5131-103MLB, Datasheet Link=https://componentsearchengine.com/Datasheets/1/MSS5131-103MLB.pdf, Manufacturer_Part_Number=MSS5131-103MLB, Mouser Price/Stock=https://www.mouser.com/Search/Refine.aspx?Keyword=994-MSS5131-103MLB
Q1: "Integrated Circuit", Manufacturer_Name="ON Semiconductor", Mouser Part Number=512-FDC638P, RS Part Number=7614413, Datasheet Link=http://docs-emea.rs-online.com/webdocs/10e2/0900766b810e24f1.pdf, Height=1.1mm, Manufacturer_Part_Number=FDC638P, Mouser Price/Stock=https://www.mouser.com/Search/Refine.aspx?Keyword=512-FDC638P, RS Price/Stock=https://uk.rs-online.com/web/p/products/7614413
R1 R1_1 R2 R2_1 R3 R3_1 R4 R4_1 R5 R5_1 R6 R6_1 R7 R7_1 R8 R8_1 R9 R9_1 R10 R10_1 R11 R11_1 R12 R12_1 R13 R13_1 R14 R14_1 R15 R15_1 R16 R16_1 R17 R17_1 R18 R18_1 R19 R19_1 R20 R20_1 R21 R21_1 R22 R22_1 R23 R23_1 R24 R24_1 R25 R25_1 R26 R26_1 R27 R27_1 R28 R28_1 R29 R30 R31 R32 R33 R34 R35 R36 R37 R38 R39 R40 R41 R42 R126 R127 R128 R129 R130 R131 R132 R133 R134 R135 R139 R140 R141 R142 R143 R144 R145 R146 R147 R148 R149 R150 R200 R201 R202 R203 R204 R205 R206 R207 R208 R209 R210 R211 R212 R213 R214 R215 R216 R217 R218 R219 R220 R221 R222 R223 R653 R653_1: "Resistor", LatestRevisionDate=17-Jul-2002, LatestRevisionNote="Re-released for DXP Platform.", PackageDescription="Axial Device, Thru-Hole; 2 Leads; 0.3 in Pin Spacing", PackageReference=AXIAL-0.3, Published=8-Jun-2000, Publisher="Altium Limited"
T100: "Transformer", Manufacturer_Name=Bourns, Mouser Part Number=652-SM-LP-5001E, RS Part Number=1728670, Allied Price/Stock=https://www.alliedelec.com/bourns-sm-lp-5001e/70155232/, Allied_Number=70155232, Datasheet Link=https://www.bourns.com/pdfs/SMLP5001.pdf, Height=7mm, Manufacturer_Part_Number=SM-LP-5001E, Mouser Price/Stock=https://www.mouser.com/Search/Refine.aspx?Keyword=652-SM-LP-5001E, RS Price/Stock=https://uk.rs-online.com/web/p/products/1728670
T102: "Transformer", Manufacturer_Name=COILCRAFT, Mouser Part Number=994-FA2469-ALB, Datasheet Link=https://www.mouser.com/datasheet/2/597/fa2469-463452.pdf, Height=9.02mm, Manufacturer_Part_Number=FA2469-ALB, Mouser Price/Stock=https://www.mouser.com/Search/Refine.aspx?Keyword=994-FA2469-ALB
T103: "1:1 Transformer", Manufacturer_Name=Bourns, Mouser Part Number=652-SM-LP-5001E, RS Part Number=1728670, Allied Price/Stock=https://www.alliedelec.com/bourns-sm-lp-5001e/70155232/, Allied_Number=70155232, Datasheet Link=https://www.bourns.com/pdfs/SMLP5001.pdf, Height=7mm, Manufacturer_Part_Number=SM-LP-5001E, Mouser Price/Stock=https://www.mouser.com/Search/Refine.aspx?Keyword=652-SM-LP-5001E, RS Price/Stock=https://uk.rs-online.com/web/p/products/1728670
L1 L1_1 L2 L2_1 L3 L3_1 L4 L4_1 L5 L5_1 L6 L6_1 L7 L7_1 L8 L8_1 L9 L9_1 L10 L10_1 L11 L11_1 L12 L12_1 L13 L13_1 L14 L14_1 L15 L15_1 L16 L16_1 L17 L17_1 L117 L118 L119 L120 L121 L122 L123 L124 L130 L131 L132 L133 L200 L201 L202: Code_IEC=1005, Code_JEITA=0402, LatestRevisionDate=29-May-2009, LatestRevisionNote="IPC-7351 Footprint Added.", PackageDescription="Chip Inductor", PackageReference=0402-A, Published=8-Jun-2000, Publisher="Altium Limited"

## Nets (pads, with @x,y where several pads share a name; then routed paths per layer and width w, separated by ;. In a path a pad name is that pad's centre, name@x,y a point inside that pad or via, vN(x,y) a via of type N, cw(c..) or ccw(c..) an arc to the next point about the centre after c; other vN are vias at no path point)
2.5V_1: 
2.5V_2: 
2.5V_3: 
2.83V: 
3.0V: 
3.0V_1: 
3.0V_2: 
3.0V_3: 
3.0V_log: 
-Z_CIC: 
-Z_DEPLOY_SW_1: 
-Z_DEPLOY_SW_2: 
-Z_THERMISTOR: 
CMD_H/W_Bit_0: 
CMD_H/W_Bit_1: 
CMD_H/W_Bit_2: 
CMD_H/W_Bit_3: 
CMD_H/W_BITS_STROBE: 
CMD_SERIAL_DATA: 
GND: 
I2C2_SCL: 
I2C2_SDA: 
ICR_RSSI: 
IF+: 
IF-: 
LT: 
MODEM_CXR_DET: 
Net*1_1: 
Net*1_4: 
Net*1_5: 
Net*?_1: 
Net*?_4: 
Net*?_5: 
NetC1_2: 
NetC2_2: 
NetC4_2: 
NetC6_2: 
NetC8_2: 
NetC9_2: 
NetC11_1: 
NetC13_1: 
NetC15_2: 
NetC16_2: 
NetC17_1: 
NetC17_2: 
NetC18_1: 
NetC21_1: 
NetC23_1: 
NetC25_2: 
NetC28_2: 
NetC30_1: 
NetC31_1: 
NetC31_2: 
NetC32_1: 
NetC32_2: 
NetC34_1: 
NetC38_1: 
NetC44_1: 
NetC50_2: 
NetC51_1: 
NetC51_2: 
NetC54_2: 
NetC55_2: 
NetC56_2: 
NetC57_1: 
NetC58_2: 
NetC62_2: 
NetC65_1: 
NetC68_1: 
NetC100_1: 
NetC100_2: 
NetC105_2: 
NetC107_2: 
NetC110_2: 
NetC111_1: 
NetC111_2: 
NetC114_1: 
NetC114_2: 
NetC115_1: 
NetC115_2: 
NetC117_2: 
NetC120_2: 
NetC121_1: 
NetC123_2: 
NetC124_2: 
NetC129_1: 
NetC129_2: 
NetC130_2: 
NetC132_2: 
NetC133_2: 
NetC135_1: 
NetC136_2: 
NetC137_1: 
NetC200_1: 
NetC200_2: 
NetC201_2: 
NetC202_1: 
NetC202_2: 
NetC204_2: 
NetC205_1: 
NetC207_1: 
NetC208_1: 
NetC209_1: 
NetC210_1: 
NetC212_1: 
NetC650_1: 
NetC650_2: 
NetC651_2: 
NetD6_2: 
NetD?_1: 
NetIC1_3: 
NetIC1_14: 
NetIC2_1: 
NetIC3_3: 
NetIC3_14: 
NetIC4_1: 
NetIC5_3: 
NetIC7_1: 
NetIC8_3: 
NetIC9_1: 
NetIC10_2: 
NetIC11_3: 
NetIC11_6: 
NetIC11_8: 
NetIC11_12: 
NetIC12_3: 
NetIC13_6: 
NetIC13_8: 
NetIC17_3: 
NetIC18_2: 
NetIC102_3: 
NetIC102_4: 
NetIC102_5: 
NetIC102_6: 
NetIC104_4: 
NetIC104_5: 
NetIC104_6: 
NetIC105_1: 
NetIC105_3: 
NetIC105_4: 
NetIC106_5: 
NetIC200_1: 
NetIC200_2: 
NetIC200_4: 
NetIC200_5: 
NetIC200_7: 
NetIC200_8: 
NetIC201_1: 
NetIC201_8: 
NetIC201_9: 
NetIC201_10: 
NetIC203_5: 
NetIC550_2: 
NetIC678_5: 
NetIC678_6: 
NetIC900_1: 
NetL15_2: 
NetL17_1: 
NetR100_1: 
NetR101_1: 
NetR112_2: 
NetR115_2: 
NetR208_2: 
NetR218_2: 
PAEn_N: 
PAEn_P: 
PB_ENABLE: 
RX/TX_CNTL: 
SENSOR_PWR: 
SPI1_MISO: 
SPI1_MOSI: 
SPI1_SCLK: 
SPI1_SS: 
TLM: 
TLM_DATA: 
TLM_ENABLE: 
TX_PA_CURRENT: 
TX_PWR_FWD: 
TX_PWR_RFLT: 
TX_TEMP: 
Vbatt: 
VccPA: 
VGA_CTRL: 
VPA: 
pads on no net: C1.1 C1.2 C1_1.1 C1_1.2 C2.1 C2.2 C2_1.1 C2_1.2 C3.1 C3.2 C3_1.1 C3_1.2 C4.1 C4.2 C4_1.1 C4_1.2 C6.1 C6.2 C6_1.1 C6_1.2 C8.1 C8.2 C8_1.1 C8_1.2 C9.1 C9.2 C9_1.1 C9_1.2 C11.1 C11.2 C11_1.1 C11_1.2 C12.1 C12.2 C12_1.1 C12_1.2 C13.1 C13.2 C13_1.1 C13_1.2 C14.1 C14.2 C14_1.1 C14_1.2 C15.1 C15.2 C15_1.1 C15_1.2 C16.1 C16.2 C16_1.1 C16_1.2 C17.1 C17.2 C17_1.1 C17_1.2 C18.1 C18.2 C18_1.1 C18_1.2 C19.1 C19.2 C19_1.1 C19_1.2 C20.1 C20.2 C20_1.1 C20_1.2 C21.1 C21.2 C21_1.1 C21_1.2 C23.1 C23.2 C23_1.1 C23_1.2 C25.1 C25.2 C25_1.1 C25_1.2 C27.1 C27.2 C27_1.1 C27_1.2 C28.1 C28.2 C28_1.1 C28_1.2 C29.1 C29.2 C29_1.1 C29_1.2 C30.1 C30.2 C30_1.1 C30_1.2 C31.1 C31.2 C31_1.1 C31_1.2 C32.1 C32.2 C32_1.1 C32_1.2 C34.1 C34.2 C34_1.1 C34_1.2 C36.1 C36.2 C36_1.1 C36_1.2 C37.1 C37.2 C37_1.1 C37_1.2 C38.1 C38.2 C38_1.1 C38_1.2 C39.1 C39.2 C39_1.1 C39_1.2 C40.1 C40.2 C40_1.1 C40_1.2 C41.1 C41.2 C41_1.1 C41_1.2 C42.1 C42.2 C42_1.1 C42_1.2 C43.1 C43.2 C43_1.1 C43_1.2 C44.1 C44.2 C44_1.1 C44_1.2 C45.1 C45.2 C45_1.1 C45_1.2 C46.1 C46.2 C46_1.1 C46_1.2 C47.1 C47.2 C47_1.1 C47_1.2 C48.1 C48.2 C48_1.1 C48_1.2 C49.1 C49.2 C49_1.1 C49_1.2 C50.1 C50.2 C50_1.1 C50_1.2 C51.1 C51.2 C51_1.1 C51_1.2 C52.1 C52.2 C53.1 C53.2 C54.1 C54.2 C55.1 C55.2 C56.1 C56.2 C57.1 C57.2 C58.1 C58.2 C59.1 C59.2 C60.1 C60.2 C61.1 C61.2 C62.1 C62.2 C63.1 C63.2 C64.1 C64.2 C65.1 C65.2 C66.1 C66.2 C67.1 C67.2 C68.1 C68.2 C69.1 C69.2 C139.1 C139.2 C140.1 C140.2 C141.1 C141.2 C142.1 C142.2 C143.1 C143.2 C144.1 C144.2 C145.1 C145.2 C146.1 C146.2 C147.1 C147.2 C148.1 C148.2 C149.1 C149.2 C150.1 C150.2 C151.1 C151.2 C152.1 C152.2 C153.1 C153.2 C154.1 C154.2 C155.1 C155.2 C156.1 C156.2 C157.1 C157.2 C158.1 C158.2 C159.1 C159.2 C160.1 C160.2 C161.1 C161.2 C162.1 C162.2 C163.1 C163.2 C171.1 C171.2 C172.1 C172.2 C173.1 C173.2 C174.1 C174.2 C175.1 C175.2 C200.1 C200.2 C201.1 C201.2 C202.1 C202.2 C203.1 C203.2 C204.1 C204.2 C205.1 C205.2 C206.1 C206.2 C207.1 C207.2 C208.1 C208.2 C209.1 C209.2 C210.1 C210.2 C211.1 C211.2 C212.1 C212.2 C213.1 C213.2 C214.1 C214.2 C215.1 C215.2 C650.1 C650.2 C650_1.1 C650_1.2 C651.1 C651.2 C651_1.1 C651_1.2 C?.1 C?.2 D6.1 D6.2 D?.1 D?.2 IC1.1 IC1.2 IC1.3 IC1.4 IC1.5 IC1.6 IC1.7 IC1.8 IC1.9 IC1.10 IC1.11 IC1.12 IC1.13 IC1.14 IC1.15 IC1.16 IC1.17 IC2.1 IC2.2 IC2.3 IC2.4 IC2.5 IC3.1 IC3.2 IC3.3 IC3.4 IC3.5 IC3.6 IC3.7 IC3.8 IC3.9 IC3.10 IC3.11 IC3.12 IC3.13 IC3.14 IC3.15 IC3.16 IC3.17 IC4.1 IC4.2 IC4.3 IC4.4 IC4.5 IC5.1 IC5.2 IC5.3 IC5.4 IC5.5 IC5.6 IC5.7 IC5.8 IC5.9 IC5.10 IC5.11 IC5.12 IC5.13 IC6.1 IC6.2 IC6.3 IC6.4 IC6.5 IC7.1 IC7.2 IC7.3 IC7.4 IC7.5 IC7.6 IC8.1 IC8.2 IC8.3 IC8.4 IC8.5 IC9.1 IC9.2 IC9.3 IC9.4 IC9.5 IC10.1 IC10.2 IC10.3 IC10.4 IC10.5 IC10.6 IC10.7 IC10.8 IC200.1 IC200.2 IC200.3 IC200.4 IC200.5 IC200.6 IC200.7 IC200.8 IC201.1 IC201.2 IC201.3 IC201.4 IC201.5 IC201.6 IC201.7 IC201.8 IC201.9 IC201.10 IC201.11 IC201.12 IC201.13 IC201.14 IC201.15 IC201.16 IC201.17 IC201.18 IC201.19 IC201.20 IC201.21 IC201.22 IC201.23 IC201.24 IC201.25 IC202.1 IC202.2 IC202.3 IC202.4 IC203.1 IC203.2 IC203.3 IC203.4 IC203.5 J102.1 J102.2 J102.3 J102.4 J102.5 J?.1 J?.2 J?.3 J?.4 J?.5 L1.1 L1.2 L1_1.1 L1_1.2 L2.1 L2.2 L2_1.1 L2_1.2 L3.1 L3.2 L3_1.1 L3_1.2 L4.1 L4.2 L4_1.1 L4_1.2 L5.1 L5.2 L5_1.1 L5_1.2 L6.1 L6.2 L6_1.1 L6_1.2 L7.1 L7.2 L7_1.1 L7_1.2 L8.1 L8.2 L8_1.1 L8_1.2 L9.1 L9.2 L9_1.1 L9_1.2 L10.1 L10.2 L10_1.1 L10_1.2 L11.1 L11.2 L11_1.1 L11_1.2 L12.1 L12.2 L12_1.1 L12_1.2 L13.1 L13.2 L13_1.1 L13_1.2 L14.1 L14.2 L14_1.1 L14_1.2 L15.1 L15.2 L15_1.1 L15_1.2 L16.1 L16.2 L16_1.1 L16_1.2 L17.1 L17.2 L17_1.1 L17_1.2 L18.1 L18.2 L19.1 L19.2 L117.1 L117.2 L118.1 L118.2 L119.1 L119.2 L120.1 L120.2 L121.1 L121.2 L122.1 L122.2 L123.1 L123.2 L124.1 L124.2 L130.1 L130.2 L131.1 L131.2 L132.1 L132.2 L133.1 L133.2 L200.1 L200.2 L201.1 L201.2 L202.1 L202.2 Q1.1 Q1.2 Q1.3 Q1.4 Q1.5 Q1.6 R1.1 R1.2 R1_1.1 R1_1.2 R2.1 R2.2 R2_1.1 R2_1.2 R3.1 R3.2 R3_1.1 R3_1.2 R4.1 R4.2 R4_1.1 R4_1.2 R5.1 R5.2 R5_1.1 R5_1.2 R6.1 R6.2 R6_1.1 R6_1.2 R7.1 R7.2 R7_1.1 R7_1.2 R8.1 R8.2 R8_1.1 R8_1.2 R9.1 R9.2 R9_1.1 R9_1.2 R10.1 R10.2 R10_1.1 R10_1.2 R11.1 R11.2 R11_1.1 R11_1.2 R12.1 R12.2 R12_1.1 R12_1.2 R13.1 R13.2 R13_1.1 R13_1.2 R14.1 R14.2 R14_1.1 R14_1.2 R15.1 R15.2 R15_1.1 R15_1.2 R16.1 R16.2 R16_1.1 R16_1.2 R17.1 R17.2 R17_1.1 R17_1.2 R18.1 R18.2 R18_1.1 R18_1.2 R19.1 R19.2 R19_1.1 R19_1.2 R20.1 R20.2 R20_1.1 R20_1.2 R21.1 R21.2 R21_1.1 R21_1.2 R22.1 R22.2 R22_1.1 R22_1.2 R23.1 R23.2 R23_1.1 R23_1.2 R24.1 R24.2 R24_1.1 R24_1.2 R25.1 R25.2 R25_1.1 R25_1.2 R26.1 R26.2 R26_1.1 R26_1.2 R27.1 R27.2 R27_1.1 R27_1.2 R28.1 R28.2 R28_1.1 R28_1.2 R29.1 R29.2 R30.1 R30.2 R31.1 R31.2 R32.1 R32.2 R33.1 R33.2 R34.1 R34.2 R35.1 R35.2 R36.1 R36.2 R37.1 R37.2 R38.1 R38.2 R39.1 R39.2 R40.1 R40.2 R41.1 R41.2 R42.1 R42.2 R126.1 R126.2 R127.1 R127.2 R128.1 R128.2 R129.1 R129.2 R130.1 R130.2 R131.1 R131.2 R132.1 R132.2 R133.1 R133.2 R134.1 R134.2 R135.1 R135.2 R139.1 R139.2 R140.1 R140.2 R141.1 R141.2 R142.1 R142.2 R143.1 R143.2 R144.1 R144.2 R145.1 R145.2 R146.1 R146.2 R147.1 R147.2 R148.1 R148.2 R149.1 R149.2 R150.1 R150.2 R200.1 R200.2 R201.1 R201.2 R202.1 R202.2 R203.1 R203.2 R204.1 R204.2 R205.1 R205.2 R206.1 R206.2 R207.1 R207.2 R208.1 R208.2 R209.1 R209.2 R210.1 R210.2 R211.1 R211.2 R212.1 R212.2 R213.1 R213.2 R214.1 R214.2 R215.1 R215.2 R216.1 R216.2 R217.1 R217.2 R218.1 R218.2 R219.1 R219.2 R220.1 R220.2 R221.1 R221.2 R222.1 R222.2 R223.1 R223.2 R653.1 R653.2 R653_1.1 R653_1.2 T100.1 T100.2 T100.3 T100.4 T100.5 T100.6 T102.1 T102.2 T102.3 T102.4 T102.5 T102.6 T103.1 T103.2 T103.3 T103.4 T103.5 T103.6

## Polygon pours and split planes (outlines as drawn)
no net on GND (split plane): 4529.9,3994.9 4529.9,1020.1 1020.1,1020.1 1020.1,3994.9